# Altium PCB M-BOX.PcbDoc
Units mm, origin at the board's own origin, x right, y up, seen from the top; angles counter-clockwise.
Board outline 35.56 x 60.96 mm, 2 copper layers (Top Layer, Bottom Layer); 37 components, 91 nets, 304 pads, 186 vias.
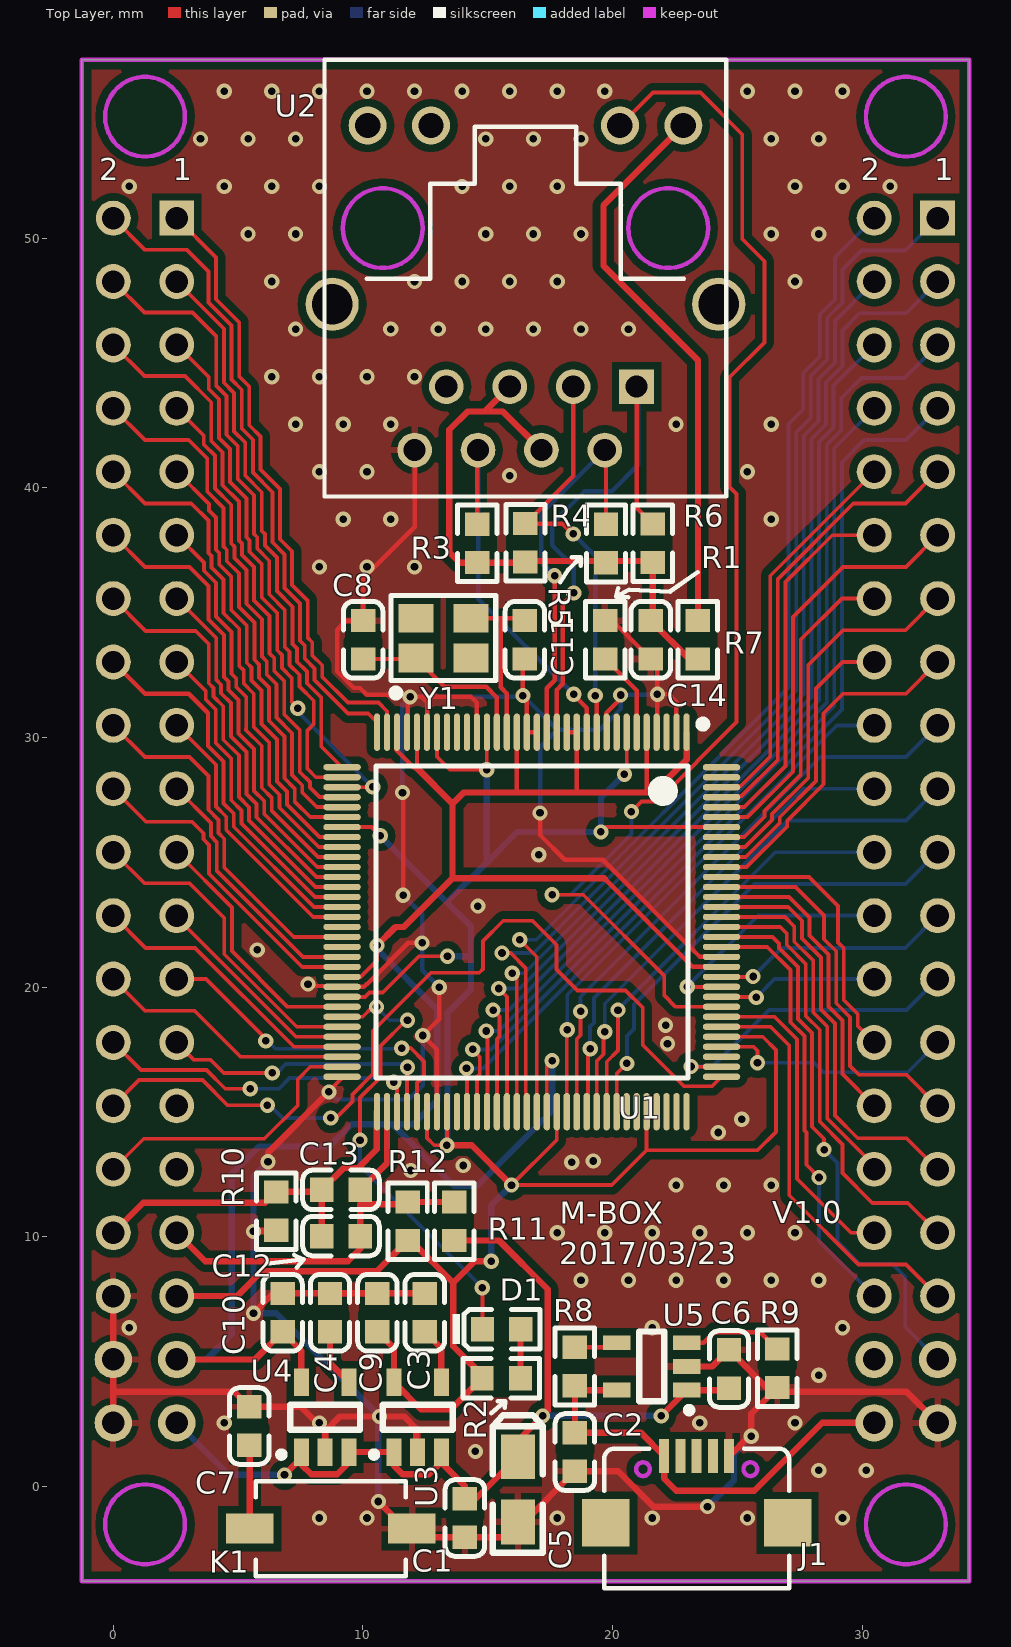
[diagram p0: Top Layer view]
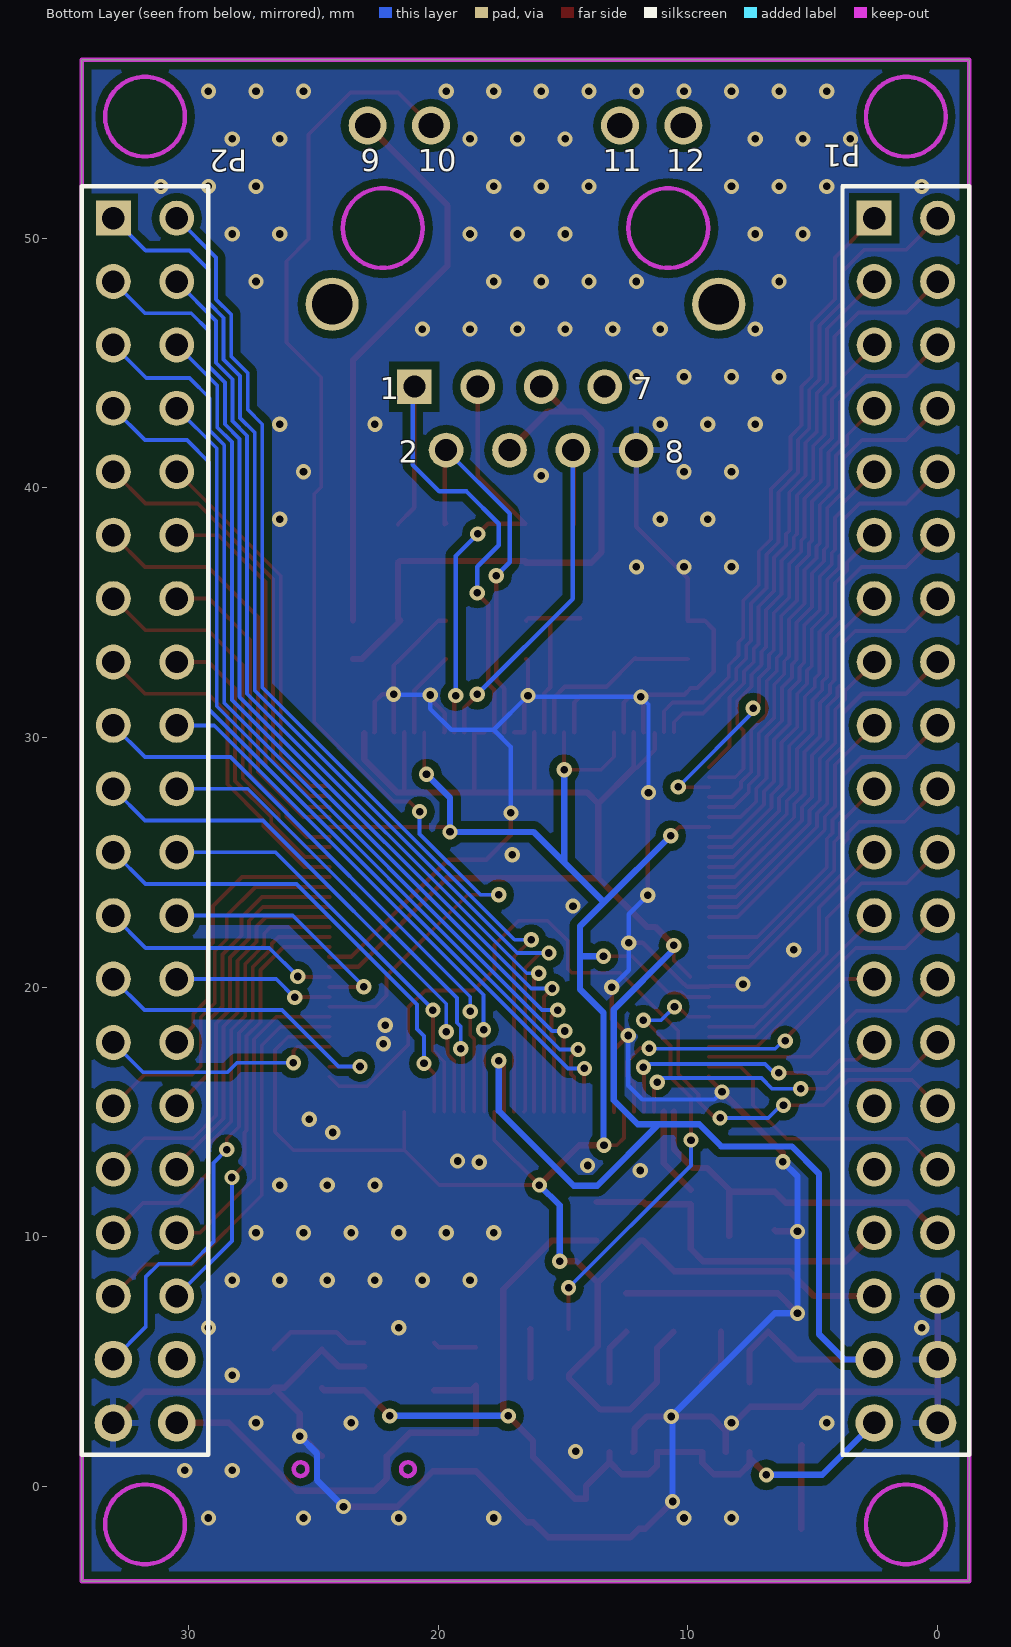
[diagram p1: Bottom Layer view, seen from below]

## Layer stack, top to bottom
Top Solder: solder mask 0.0102, Solder Resist, Dk 3.5
Top Layer: signal copper 0.0356
Dielectric 1: dielectric 0.32, FR-4, Dk 4.8
Bottom Layer: signal copper 0.0356
Bottom Solder: solder mask 0.0102, Solder Resist, Dk 3.5

## Board outline
-1.27,-3.81 -1.27,57.15 34.29,57.15 34.29,-3.81

## Design rules (kind name [scope] priority, off if disabled: settings)
Clearance [All] p1: gap=0.127
ComponentClearance [All] p1 off: gap=0.254 collisioncheckmode=3 verticalgap=0.178 showdistances=FALSE
Height [All] p1 off: minheight=0 maxheight=25.4 prefheight=12.7
HoleSize [All] p1 off: absolutevalues=TRUE maxlimit=2.54 minlimit=0.025 maxpercent=80.000 minpercent=20.000
HoleToHoleClearance [All] p1 off: gap=0.178 allowstackedmicrovias=TRUE
LayerPairs [All] p1 off: enforce=TRUE
MinimumSolderMaskSliver [All] p1 off: minsoldermaskwidth=0.178
NetAntennae [All] p1 off: netantennaetolerance=0
PolygonConnect ISVIA [ISVIA] p1: connectstyle=Direct reliefconductorwidth=0.254 reliefentries=4 polygonreliefangle="90 Angle" airgapwidth=0.254
PolygonConnect [All] p2: connectstyle=Relief reliefconductorwidth=0.254 reliefentries=4 polygonreliefangle="90 Angle" airgapwidth=0.254
RoutingVias [All] p1: holewidth=0.305 width=0.61 viastyle="Through Hole" minholewidth=0.305 minwidth=0.61 maxholewidth=0.305 maxwidth=0.61
SilkToBoardRegionClearance [All] p1 off:
SilkToSilkClearance [All] p1 off: silktosilkclearance=0.178
SilkToSolderMaskClearance [IsPad] p1 off: minsilkscreentomaskgap=0.178 clearancetoexposedcopper=TRUE
SolderMaskExpansion [All] p1: expansion=0.102
Width [All] p1: maxlimit=0.254 minlimit=0.152 preferedwidth=0.254
20 further rules are at their usual default settings.

## Components (designator, comment, footprint, x,y, rotation, side; value= is the part's Value field where it differs from the comment)
C1 "1uF/X7R" LC-0603_C 14.084,-1.27 r90 top
C2 "1uF" LC-0603_C 18.491,1.372 r90 top
C3 "22nF" LC-0603_C 12.478,6.957 r270 top
C4 "22nF" LC-0603_C 8.68,6.957 r270 top
C5 "220uF/6.3V" LC-CASE-A_3216 16.207,-0.126 r90 top
C6 "1uF" LC-0603_C 24.663,4.699 r270 top
C7 "100nF" LC-0603_C 5.445,2.416 r270 top
C8 "20pF" LC-0603_C 10.008,33.909 r270 top
C9 "100nF" LC-0603_C 10.579,6.957 r270 top
C10 "100nF" LC-0603_C 6.782,6.957 r270 top
C11 "20pF" LC-0603_C 16.485,33.909 r90 top
C12 "100nF" LC-0603_C 9.121,10.023 r0 top
C13 "1uF" LC-0603_C 9.121,11.874 r0 top
C14 "100nF" LC-0603_C 21.531,33.909 r90 top
D1 "黄灯 0603" LC-0603_LED_S1 15.554,6.296 r0 top
J1 "MicroUSB" MicroUSB 23.368,-0.127 r180 top
K1 "TS-1107U" TS-1107U 8.712,-1.699 r0 top
P1 "H2X20C" H2X20C 1.27,29.21 r270 bottom
P2 "H2X20C" H2X20C 31.75,29.21 r270 bottom
R1 "18KΩ" LC-0603_R 19.702,33.909 r90 top
R2 "1KΩ" LC-0603_R 15.539,4.335 r180 top
R3 "47Ω" LC-0603_R 14.58,37.77 r90 top
R4 "47Ω" LC-0603_R 16.51,37.793 r90 top
R5 "47Ω" LC-0603_R 19.736,37.766 r90 top
R6 "47Ω" LC-0603_R 21.615,37.776 r90 top
R7 "470Ω" LC-0603_R 23.419,33.909 r90 top
R8 "10KΩ" LC-0603_R 18.491,4.801 r270 top
R9 "6.8KΩ" LC-0603_R 26.594,4.724 r90 top
R10 "0Ω" LC-0603_R 6.528,11.024 r90 top
R11 "0Ω" LC-0603_R 13.665,10.617 r90 top
R12 "0Ω" LC-0603_R 11.786,10.617 r90 top
U1 "CH9130L" LC-LQFP-128_14x14x04P 16.764,22.606 r180 top
U2 "HY951180A" HY951180A 16.51,50.4 r0 top
U3 "RT9193-33GB" LC-SOT-23-5 12.192,2.771 r270 top
U4 "RT9193-18GB" LC-SOT-23-5 8.484,2.771 r270 top
U5 "EC100D" LC-SOT-23-5 21.565,4.801 r0 top
Y1 "30MHZ 12PF 10PPM" LC-SMD-3225_4P 13.221,33.977 r0 top

## Footprints (in the part's own frame and the unit in brackets; to place one, negate y for a bottom-side part, rotate by r counter-clockwise, add the part's x,y. Pads: shape width x height; smd on the part's side, far side on the other; paste and mask are expansions set on the pad)
H2X20C [mm]
  rect 1.4x1.4 hole 0.9: 1(-21.59,-1.27)
  round 1.4 hole 0.9: 2(-21.59,1.27) 3(-19.05,-1.27) 4(-19.05,1.27) 5(-16.51,-1.27) 6(-16.51,1.27) 7(-13.97,-1.27) 8(-13.97,1.27) 9(-11.43,-1.27) 10(-11.43,1.27) 11(-8.89,-1.27) 12(-8.89,1.27) 13(-6.35,-1.27) 14(-6.35,1.27) 15(-3.81,-1.27) 16(-3.81,1.27) 17(-1.27,-1.27) 18(-1.27,1.27) 19(1.27,-1.27) 20(1.27,1.27) 21(3.81,-1.27) 22(3.81,1.27) 23(6.35,-1.27) 24(6.35,1.27) 25(8.89,-1.27) 26(8.89,1.27) 27(11.43,-1.27) 28(11.43,1.27) 29(13.97,-1.27) 30(13.97,1.27) 31(16.51,-1.27) 32(16.51,1.27) 33(19.05,-1.27) 34(19.05,1.27) 35(21.59,-1.27) 36(21.59,1.27)
  round 1.5 hole 0.9: 37(24.13,-1.27) 38(24.13,1.27) 39(26.67,-1.27) 40(26.67,1.27)
  silkscreen extent -22.86,-2.54 27.94,2.54, body extent -22.86,-2.5 27.94,2.52, height 10.84
HY951180A [mm]
  round 2.13 hole 1.63: 0(-7.745,-3.05) 0(7.745,-3.05)
  rect 1.39x1.39 hole 0.89: 1(4.45,-6.35)
  round 1.39 hole 0.89: 2(3.18,-8.89) 3(1.91,-6.35) 4(0.64,-8.89) 5(-0.63,-6.35) 6(-1.9,-8.89) 7(-3.17,-6.35) 8(-4.44,-8.89)
  round 1.52 hole 1.02: 9(6.325,4.11) 10(3.785,4.11) 11(-3.785,4.11) 12(-6.325,4.11)
  Keep-Out Layer circle w0.178: c5.715,0 r1.6
  Keep-Out Layer circle w0.178: c-5.715,0 r1.6
  silkscreen extent -8.05,-10.75 8.05,6.75
LC-0603_C [mm]
  rect 0.93x0.98 smd: 1(-0.77,0) 2(0.77,0)
  silkscreen extent -1.53,-0.79 1.54,0.79, body extent -0.8,-0.4 0.8,0.4, height 0.3
LC-0603_LED_S1 [mm]
  rect 0.93x0.98 smd: A(0.77,0) K(-0.77,0)
  silkscreen extent -1.97,-0.79 1.54,0.79, body extent -0.8,-0.4 0.8,0.4, height 0.6
LC-0603_R [mm]
  rect 0.93x0.98 smd: 1(-0.77,0) 2(0.77,0)
  silkscreen extent -1.53,-0.79 1.54,0.79, body extent -0.85,-0.4 0.85,0.4, height 0.56
LC-CASE-A_3216 [mm]
  rect 1.8x1.35 smd: 1(1.31,0) 2(-1.31,0)
  silkscreen extent -2.54,-1 2.97,1, body extent -1.7,-0.84 1.7,0.84, height 1.71
LC-LQFP-128_14x14x04P [mm]
  oval 0.25x1.5 smd mask+0.051: 1(-6.2,-7.6) 2(-5.8,-7.6) 3(-5.4,-7.6) 4(-5,-7.6) 5(-4.6,-7.6) 6(-4.2,-7.6) 7(-3.8,-7.6) 8(-3.4,-7.6) 9(-3,-7.6) 10(-2.6,-7.6) 11(-2.2,-7.6) 12(-1.8,-7.6) 13(-1.4,-7.6) 14(-1,-7.6) 15(-0.6,-7.6) 16(-0.2,-7.6) 17(0.2,-7.6) 18(0.6,-7.6) 19(1,-7.6) 20(1.4,-7.6) 21(1.8,-7.6) 22(2.2,-7.6) 23(2.6,-7.6) 24(3,-7.6) 25(3.4,-7.6) 26(3.8,-7.6) 27(4.2,-7.6) 28(4.6,-7.6) 29(5,-7.6) 30(5.4,-7.6) 31(5.8,-7.6) 32(6.2,-7.6) 65(6.2,7.6) 66(5.8,7.6) 67(5.4,7.6) 68(5,7.6) 69(4.6,7.6) 70(4.2,7.6) 71(3.8,7.6) 72(3.4,7.6) 73(3,7.6) 74(2.6,7.6) 75(2.2,7.6) 76(1.8,7.6) 77(1.4,7.6) 78(1,7.6) 79(0.6,7.6) 80(0.2,7.6) 81(-0.2,7.6) 82(-0.6,7.6) 83(-1,7.6) 84(-1.4,7.6) 85(-1.8,7.6) 86(-2.2,7.6) 87(-2.6,7.6) 88(-3,7.6) 89(-3.4,7.6) 90(-3.8,7.6) 91(-4.2,7.6) 92(-4.6,7.6) 93(-5,7.6) 94(-5.4,7.6) 95(-5.8,7.6) 96(-6.2,7.6)
  oval 1.5x0.25 smd mask+0.051: 33(7.6,-6.2) 34(7.6,-5.8) 35(7.6,-5.4) 36(7.6,-5) 37(7.6,-4.6) 38(7.6,-4.2) 39(7.6,-3.8) 40(7.6,-3.4) 41(7.6,-3) 42(7.6,-2.6) 43(7.6,-2.2) 44(7.6,-1.8) 45(7.6,-1.4) 46(7.6,-1) 47(7.6,-0.6) 48(7.6,-0.2) 49(7.6,0.2) 50(7.6,0.6) 51(7.6,1) 52(7.6,1.4) 53(7.6,1.8) 54(7.6,2.2) 55(7.6,2.6) 56(7.6,3) 57(7.6,3.4) 58(7.6,3.8) 59(7.6,4.2) 60(7.6,4.6) 61(7.6,5) 62(7.6,5.4) 63(7.6,5.8) 64(7.6,6.2) 97(-7.6,6.2) 98(-7.6,5.8) 99(-7.6,5.4) 100(-7.6,5) 101(-7.6,4.6) 102(-7.6,4.2) 103(-7.6,3.8) 104(-7.6,3.4) 105(-7.6,3) 106(-7.6,2.6) 107(-7.6,2.2) 108(-7.6,1.8) 109(-7.6,1.4) 110(-7.6,1) 111(-7.6,0.6) 112(-7.6,0.2) 113(-7.6,-0.2) 114(-7.6,-0.6) 115(-7.6,-1) 116(-7.6,-1.4) 117(-7.6,-1.8) 118(-7.6,-2.2) 119(-7.6,-2.6) 120(-7.6,-3) 121(-7.6,-3.4) 122(-7.6,-3.8) 123(-7.6,-4.2) 124(-7.6,-4.6) 125(-7.6,-5) 126(-7.6,-5.4) 127(-7.6,-5.8) 128(-7.6,-6.2)
  silkscreen extent -7,-8.07 6.25,6.25
LC-SMD-3225_4P [mm]
  rect 1.4x1.15 smd: 1(-1.1,-0.8) 2(1.1,-0.8) 3(1.1,0.8) 4(-1.1,0.8)
  silkscreen extent -2.1,-2.35 2.1,1.7, body extent -1.6,-1.25 1.6,1.25, height 0.61
LC-SOT-23-5 [mm]
  rect 1.1x0.6 smd: 1(1.4,-0.95) 2(1.4,0) 3(1.4,0.95) 4(-1.4,0.95) 5(-1.4,-0.95)
  silkscreen extent -0.5,-1.87 1.62,1.4
MicroUSB [mm]
  rect 1.9x1.9 smd: 0(-3.64,1.338) 0(3.64,1.338)
  rect 0.4x1.35 smd: 1(1.3,-1.338) 2(0.65,-1.338) 3(0,-1.338) 4(-0.65,-1.338) 5(-1.3,-1.338)
  Keep-Out Layer circle w0.178: c2.15,-0.813 r0.275
  Keep-Out Layer circle w0.178: c-2.15,-0.813 r0.275
  silkscreen extent -3.7,-1.64 3.7,3.96
TS-1107U [mm] "轻触按钮"
  rect 1.9x1.2 smd: 1(-3.25,0) 2(3.25,0)
  silkscreen extent -3,-1.9 3,1.9

## Part data
C1 C2 C6 C13: library part "0603 1uF (105) 10% 50V", "贴片电容"
C3 C4: library part "0603 22nF (223) 10% 50V", "贴片电容"
C5: library part "3216 10uF (106) 10% 16V", "钽电容"
C7 C9 C10 C12 C14: library part "0603 100nF (104) 10% 50V", "贴片电容"
C8 C11: library part "0603 20pF (200) 5% 50V", "贴片电容"
D1: library part "0603 黄灯", "发光二极管"
K1: library part SW_TS-1107U, "轻触按钮"
P1 P2: "排母/2.54mm 2*20P 长脚排座"
R1: library part "0603 18KΩ (1802) 1%", "贴片电阻"
R2: library part "0603 1KΩ (1001) 1%", "贴片电阻"
R3 R4 R5 R6: library part "0603 47Ω (47R0) 1%", "贴片电阻"
R7: library part "0603 470Ω (4700) 1%", "贴片电阻"
R8: library part "0603 10KΩ (1002) 1%", "贴片电阻"
R9: library part "0603 6.8KΩ (6801) 1%", "贴片电阻"
R10 R11 R12: library part "0603 0Ω (0R0) 1%", "贴片电阻"
U1: "以太网扩展多外设接口芯片"
U2: "网口"
U3: "RT9193 Series 300 mA 3.3 V"
U4: "RT9193 Series 1.8V 300 mA"
U5: "短路、过流保护芯片"
Y1: library part "SMD-3225_4P  16MHZ 9PF 10PPM", "贴片晶振"

## Via types
v1: diameter 0.61, hole 0.305, Top Layer to Bottom Layer, 186 vias

## Nets (pads, with @x,y where several pads share a name; then routed paths per layer and width w, separated by ;. In a path a pad name is that pad's centre, name@x,y a point inside that pad or via, vN(x,y) a via of type N, cw(c..) or ccw(c..) an arc to the next point about the centre after c; other vN are vias at no path point)
1V8: C10.2 P1.37 U1.1 U1.5 U1.12 U1.13 U1.18 U1.28 U1.30 U1.54 U1.82 U1.108 U4.5 | length 90.5
  Top Layer w0.152: U1.54@9.906,20.406 10.566,21.066 v1(10.566,21.666) ; U1.82 17.364,16.831 v1(17.577,17.043)
  Top Layer w0.178: U1.30@11.33,30.172 11.33,29.497 12.053,28.774 12.164,28.774 U1.28 ; 16.129,27.792 16.164,27.827 U1.18 ; U1.13 U1.12 18.564,27.863 ; 19.685,24.333 23.212,20.806 U1.108 ; 21.293,27.792 21.364,27.863 U1.5
  Top Layer w0.254: P1.37 5.675,5.08 C10.2 7.534,5.435 U4.5 ; v1(10.566,21.666) 11.303,22.403 11.633,22.403 13.589,24.359 ; 12.164,28.774 13.589,27.349 ; 19.685,24.333 19.66,24.359 13.589,24.359 ; U1.1@22.968,30.172 22.968,29.115 21.646,27.792 21.293,27.792 16.129,27.792 14.033,27.792 13.589,27.349 ; 13.589,24.359 13.589,27.349
  Bottom Layer w0.254: P1.37 3.734,5.08 4.75,6.096 4.75,12.522 5.842,13.614 8.661,13.614 9.55,14.503 12.014,14.503 12.979,15.469 12.979,19.101 10.566,21.514 v1(10.566,21.666) ; 11.189,14.491 13.64,12.04 14.58,12.04 17.577,15.037 v1(17.577,17.043)
3V3: C9.2 C14.2 P1.35 R2.2 R3.1 R4.1 R5.1 R6.1 R7.1 R12.1 U1.7 U1.21 U1.26 U1.39 U1.56 U1.70 U1.72 U1.83 U1.92 U1.101 U1.122 U2.4 U2.5 U3.5 | length 129.5
  Top Layer w0.152: U1.56 10.081,19.606 10.262,19.787 10.795,19.787 12.243,21.234 v1(13.386,21.234) ; U1.39 10.348,26.406 v1(10.693,26.06) ; U1.70 12.564,13.954 12.856,13.662 v1(13.364,13.662) U1.72 ; U1.26 12.964,29.225 13.487,28.702 v1(14.961,28.702) 14.961,30.203 U1.21 ; U1.83 17.764,13.878 v1(15.951,12.065) 19.964,12.065 21.107,13.208 ; v1(19.533,26.213) 19.726,26.406 U1.122 ; v1(20.472,28.524) 20.564,28.616 U1.7 ; U1.92 21.364,13.465 21.107,13.208 ; U1.101 26.012,18.006 26.543,17.475 26.543,14.199 25.806,13.462 21.361,13.462 21.107,13.208
  Top Layer w0.254: P1.35 4.953,7.62 5.944,8.611 10.549,8.611 R12.1 11.921,9.847 13.614,8.153 ; C9.2 11.242,5.524 U3.5 12.339,3.073 13.507,3.073 R2.2 14.769,4.459 13.614,5.613 13.614,8.153 ; v1(13.364,13.662) 14.355,13.662 v1(15.951,12.065) ; v1(15.138,9.017) 14.478,9.017 13.614,8.153 ; U2.5 14.883,43.053 ; U2.4 15.607,43.053 14.883,43.053 ; R7.1 23.071,33.139 C14.2 21.615,34.763 R6.1 21.559,37.063 16.51,37.063 R4.1 16.487,37 R3.1 13.876,37 13.462,37.414 13.462,42.316 14.199,43.053 14.883,43.053
  Bottom Layer w0.254: v1(10.693,26.06) 13.364,23.39 ; v1(13.364,13.662) 13.386,13.683 13.386,18.974 14.326,19.914 14.326,21.234 ; v1(13.386,21.234) 14.326,21.234 ; v1(14.961,28.702) 14.961,24.986 ; v1(15.138,9.017) 15.138,11.252 v1(15.951,12.065) ; v1(20.472,28.524) 19.533,27.584 v1(19.533,26.213) 16.187,26.213 14.961,24.986 ; 13.364,23.39 14.326,22.428 14.326,21.234 ; 13.364,23.39 14.961,24.986
5V: C1.2 C5.1 C6.2 P1.39 R11.1 U3.1 U3.3 U4.1 U4.3 U5.1 | length 39.1
  Top Layer w0.254: v1(6.858,0.457) U4.1@7.534,1.133 ; U4.1 U4.1@7.534,1.133 ; R11.1 15.451,9.847 17.399,7.899 17.399,3.023 v1(17.196,2.819) 16.207,1.83 C5.1 14.524,-0.5 C1.2 14.084,0.013 13.142,0.955 U3.3 13.142,0.975 12.649,0.483 11.582,0.483 11.242,0.823 U3.1 U4.3 9.434,0.95 8.966,0.483 7.925,0.483 7.534,0.874 U4.1@7.534,1.133 ; v1(21.946,2.819) 21.946,2.832 U5.1 24.585,3.851 C6.2
  Bottom Layer w0.254: P1.39 4.623,0.457 v1(6.858,0.457) ; v1(17.196,2.819) v1(21.946,2.819)
A0: P2.18 U1.84 | length 21.5
  Top Layer w0.152: U1.84 18.164,18.266 v1(18.186,18.288)
  Bottom Layer w0.152: v1(18.186,18.288) 18.186,19.689 28.977,30.48 P2.18
A1: P2.17 U1.85 | length 23.5
  Top Layer w0.152: U1.85 18.564,17.911 18.72,18.067 v1(18.72,19.025)
  Bottom Layer w0.152: v1(18.72,19.025) 18.72,19.609 28.321,29.21 31.75,29.21 P2.17
A2: P2.20 U1.86 | length 19.4
  Top Layer w0.152: U1.86 19.01,15.052 19.01,17.436 v1(19.101,17.526)
  Bottom Layer w0.152: v1(19.101,17.526) 19.101,18.415 19.253,18.567 19.253,19.558 27.635,27.94 P2.20
A3: P2.19 U1.87 | length 21.4
  Top Layer w0.152: U1.87 19.364,17.035 19.634,17.305 19.634,18.161 v1(19.685,18.212)
  Bottom Layer w0.152: v1(19.685,18.212) 19.685,19.329 27.026,26.67 31.75,26.67 P2.19
A4: P2.22 U1.88 | length 17.2
  Top Layer w0.152: U1.88 19.764,17.004 20.218,17.458 v1(20.218,19.075)
  Bottom Layer w0.152: v1(20.218,19.075) 20.218,19.1 26.518,25.4 P2.22
A5: P2.21 U1.89 | length 19.3
  Top Layer w0.152: U1.89 20.164,16.532 v1(20.574,16.942)
  Bottom Layer w0.152: v1(20.574,16.942) 20.574,18.034 20.853,18.313 20.853,19.304 25.679,24.13 31.73,24.13 33,25.4 P2.21
ADC_IN0: P1.25 U1.69 | length 13.6
  Top Layer w0.152: P1.25 3.708,20.32 6.172,17.856 6.117,17.856 v1(6.102,17.841) ; v1(11.557,17.551) 11.913,17.551 12.446,17.018 12.446,16.441 12.164,16.159 U1.69
  Bottom Layer w0.152: v1(6.102,17.841) 6.187,17.841 6.502,17.526 11.532,17.526 v1(11.557,17.551)
ADC_IN1: P1.27 U1.68 | length 11.7
  Top Layer w0.152: P1.27 3.237,17.083 3.904,17.083 4.426,16.561 v1(6.368,16.561) ; U1.68 11.764,16.768 v1(11.786,16.789)
  Bottom Layer w0.152: v1(6.368,16.561) 6.553,16.561 6.909,16.916 11.659,16.916 v1(11.786,16.789)
ADC_IN2: P1.28 U1.67 | length 13.5
  Top Layer w0.152: P1.28 1.103,16.677 3.736,16.677 4.486,15.926 v1(5.486,15.926) ; v1(11.231,16.188) 11.364,16.054 U1.67
  Bottom Layer w0.152: v1(5.486,15.926) 6.631,15.926 7.061,16.356 11.062,16.356 v1(11.231,16.188)
ADC_VRB: C12.1 C13.1 P1.34 R10.2 U1.65 | length 15.2
  Top Layer w0.254: P1.34 1.194,11.354 6.088,11.354 R10.2 C13.1@8.27,11.794 ; C12.1 C13.1 9.227,12.751 9.804,12.751 10.558,13.504 U1.65@10.558,15 ; U1.65@10.558,15.006 U1.65@10.558,15 ; U1.65 U1.65@10.558,15
ADC_VRT: C12.2 C13.2 P1.33 R11.2 R12.2 U1.66 | length 17.2
  Top Layer w0.254: P1.33 3.683,9.017 9.398,9.017 9.891,9.51 C12.2 9.891,11.303 11.701,11.303 R12.2 R11.2 ; C13.2 10.964,12.947 U1.66
CS#: P2.27 U1.100 | length 9.9
  Top Layer w0.152: U1.100 25.65,17.606 25.806,17.45 v1(25.806,16.967)
  Bottom Layer w0.152: v1(25.806,16.967) 28.067,16.967 28.448,16.586 31.826,16.586 P2.27
CTS0: P2.38 U1.93
CTS1: P2.35 U1.102 | length 16.6
  Top Layer w0.152: U1.102 26.323,18.406 27.076,17.653 27.076,11.659 29.845,8.89 31.75,8.89 P2.35
D0: P2.15 U1.118 | length 13.9
  Top Layer w0.152: U1.118 25.365,24.806 27,26.441 27,26.673 28.448,28.121 28.448,30.968 29.23,31.75 31.75,31.75 P2.15
D1: P2.16 U1.119 | length 11.7
  Top Layer w0.152: U1.119 25.334,25.206 26.695,26.568 26.695,26.799 28.143,28.247 28.143,31.953 29.21,33.02 P2.16
D2: P2.13 U1.120 | length 15.6
  Top Layer w0.152: U1.120 25.303,25.606 26.391,26.694 26.391,26.925 27.838,28.373 27.838,32.898 29.23,34.29 31.73,34.29 33,35.56 P2.13
D3: P2.14 U1.121 | length 13.4
  Top Layer w0.152: U1.121 25.272,26.006 26.086,26.82 26.086,27.052 27.534,28.5 27.534,33.909 29.185,35.56 P2.14
D4: P2.11 U1.123 | length 17
  Top Layer w0.152: U1.123 25.409,26.806 27.229,28.626 27.229,34.826 29.233,36.83 31.75,36.83 P2.11
D5: P2.12 U1.124 | length 14.9
  Top Layer w0.152: U1.124 25.272,27.206 26.924,28.858 26.924,36.222 28.802,38.1 P2.12
D6: P2.9 U1.125 | length 18.3
  Top Layer w0.152: U1.125 24.41,27.652 25.167,27.652 26.619,29.105 26.619,36.348 29.641,39.37 31.73,39.37 33,40.64 P2.9
D7: P2.10 U1.126 | length 15.6
  Top Layer w0.152: U1.126 24.41,28.052 25.135,28.052 26.314,29.231 26.314,36.474 P2.10
D8: P2.7 U1.74 | length 37.4
  Top Layer w0.152: v1(14.148,16.739) 14.164,16.722 U1.74
  Bottom Layer w0.152: v1(14.148,16.739) 14.804,16.739 29.185,31.119 29.185,41.021 30.074,41.91 31.75,41.91 P2.7
D9: P2.8 U1.75 | length 35.4
  Top Layer w0.152: v1(14.402,17.501) 14.402,17.475 14.681,17.196 14.681,16.518 14.564,16.4 U1.75
  Bottom Layer w0.152: v1(14.402,17.501) 15.135,17.501 28.88,31.245 28.88,41.58 P2.8
D10: P2.5 U1.76 | length 39.5
  Top Layer w0.152: v1(14.935,18.237) 14.986,18.186 14.986,15.028 U1.76
  Bottom Layer w0.152: v1(14.935,18.237) 15.441,18.237 28.575,31.371 28.575,41.706 29.159,42.29 29.159,43.586 29.972,44.399 31.699,44.399 P2.5
D11: P2.6 U1.77 | length 37.6
  Top Layer w0.152: v1(15.215,19.075) 15.469,18.821 15.469,18.016 15.364,17.912 U1.77
  Bottom Layer w0.152: v1(15.215,19.075) 15.848,19.075 28.27,31.497 28.27,41.832 28.854,42.417 28.854,44.094 P2.6
D12: P2.3 U1.78 | length 42.3
  Top Layer w0.152: v1(15.443,19.939) 15.773,19.609 15.773,15.015 U1.78
  Bottom Layer w0.152: v1(15.443,19.939) 16.281,19.939 27.965,31.624 27.965,41.959 28.55,42.543 28.55,44.221 29.21,44.881 29.21,46.304 29.896,46.99 31.75,46.99 P2.3
D13: P2.4 U1.79 | length 39.6
  Top Layer w0.152: v1(15.977,20.549) 16.164,20.361 U1.79
  Bottom Layer w0.152: v1(15.977,20.549) 16.459,20.549 27.661,31.75 27.661,42.085 28.245,42.669 28.245,44.347 28.905,45.007 28.905,46.685 P2.4
D14: P2.1 U1.80 | length 45.4
  Top Layer w0.152: v1(15.57,21.361) 15.918,21.361 16.518,20.762 16.518,15.052 U1.80
  Bottom Layer w0.152: v1(15.57,21.361) 16.841,21.361 27.356,31.876 27.356,42.211 27.94,42.795 27.94,44.473 28.6,45.134 28.6,46.811 29.21,47.421 29.21,48.743 29.972,49.505 31.725,49.505 P2.1
D15: P2.2 U1.81 | length 42.3
  Top Layer w0.152: v1(16.281,21.895) 16.964,21.212 U1.81
  Bottom Layer w0.152: v1(16.281,21.895) 16.943,21.895 27.051,32.003 27.051,42.545 27.635,43.129 27.635,44.599 28.296,45.26 28.296,46.938 28.905,47.547 28.905,49.225 P2.2
ELINK#: U1.104 U2.10 | length 50.6
  Top Layer w0.152: v1(17.577,23.698) 18.821,23.698 22.073,20.447 22.073,19.66 22.526,19.206 U1.104 ; U2.10 21.614,55.829 23.52,55.829 25.197,54.153 25.197,49.962 26.086,49.073 26.086,45.822 24.689,44.425 24.689,40.03 24.968,39.751 24.968,30.612 21.793,27.437 21.163,27.437 v1(20.752,27.026)
  Bottom Layer w0.152: v1(17.577,23.698) 18.316,23.698 20.752,26.134 v1(20.752,27.026)
GND: C1.1 C2.1 C3.1 C4.1 C5.2 C6.1 C7.1 C8.1 C9.1 C10.1 C11.1 C14.1 J1.5 K1.2 P1.36 P1.38 P1.40 P2.39 R1.2 R9.1 R10.1 U1.2 U1.4 U1.9 U1.16 U1.17 U1.22 U1.27 U1.29 U1.55 U1.64 U1.71 U1.109 U2.8 U3.2 U4.2 U5.2 | length 171.7
  Top Layer w0.178: v1(7.798,20.117) 7.875,20.04 9.13,20.04 U1.55 10.032,20.006 10.13,20.104 10.147,20.104 11.811,21.768 v1(12.37,21.768) ; v1(8.636,15.799) 8.636,15.824 9.164,16.352 U1.64 ; v1(11.582,27.788) 11.608,27.762 v1(11.608,23.673) ; U1.29 11.798,30.24 11.798,31.534 v1(11.887,31.623) ; U2.8 12.07,38.435 10.008,36.373 C8.1 9.33,34.679 8.966,34.315 8.966,32.639 9.627,31.979 9.881,31.979 10.147,31.712 11.798,31.712 v1(11.887,31.623) ; U1.27 12.573,30.215 12.573,31.394 12.344,31.623 ; U1.71 12.964,17.491 v1(12.395,18.059) 13.056,18.72 v1(13.056,19.99) ; U1.22 14.554,30.216 14.554,31.394 14.326,31.623 12.344,31.623 ; C11.1 16.408,33.063 v1(16.408,31.674) 16.564,31.518 U1.17 U1.16 ; v1(17.094,26.975) 17.094,26.086 18.085,25.095 19.609,25.095 23.498,21.206 U1.109 ; R1.2 19.991,34.679 C14.1 21.793,32.877 v1(21.793,31.725) ; U1.9 19.736,30.234 19.736,30.963 20.32,31.547 v1(20.32,31.699) ; U1.4 21.793,30.235 v1(21.793,31.725) ; U1.2 22.555,30.215 22.555,31.42 22.25,31.725 v1(21.793,31.725) ; v1(11.887,31.623) 12.344,31.623
  Top Layer w0.254: P1.40 0,3.81 ; P1.36 P1.38 0,3.81 ; v1(5.613,6.934) 6.406,7.727 C10.1 C4.1 C9.1 C3.1 ; v1(5.613,10.211) 6.485,10.211 R10.1 ; v1(6.198,13.005) 6.198,13.36 v1(8.636,15.799) ; U4.2 8.484,2.21 ; v1(10.617,-0.61) 11.707,-1.699 K1.2 12.303,-2.04 C1.1 15.604,-2.04 C5.2 16.453,-1.436 C2.1 20.226,0.602 21.641,-0.813 v1(23.8,-0.813) ; U3.2 12.141,1.421 12.141,2.311 11.659,2.794 v1(10.668,2.794) 9.068,2.794 8.484,2.21 ; U5.2 23.995,4.801 C6.1 26.178,3.954 R9.1 ; J1.5 25.464,2.007 v1(25.552,2.007) 25.552,2.913 R9.1 ; P2.39 31.775,3.785 26.764,3.785 R9.1 ; 0,3.81 0.025,3.785 4.846,3.785 C7.1 7.508,3.186 8.484,2.21
  Bottom Layer w0.178: v1(8.636,15.799) 8.941,15.494 11.836,15.494 12.395,16.053 v1(12.395,18.059) ; v1(11.582,27.788) 11.582,31.318 v1(11.887,31.623) 16.358,31.623 v1(16.408,31.674) 17.78,30.302 ; v1(11.608,23.673) 12.37,22.911 v1(12.37,21.768) 12.37,20.676 v1(13.056,19.99) ; v1(17.094,26.975) 17.094,29.616 17.78,30.302 ; v1(21.793,31.725) 21.768,31.699 v1(20.32,31.699) 20.32,31.14 19.482,30.302 17.78,30.302
  Bottom Layer w0.254: v1(6.198,13.005) 5.613,12.421 v1(5.613,10.211) v1(5.613,6.934) 6.528,6.934 v1(10.668,2.794) 10.617,2.743 v1(10.617,-0.61) ; v1(23.8,-0.813) 24.862,0.249 24.862,1.316 v1(25.552,2.007)
  other v1: 8.255,-1.27 10.16,-1.27 17.78,-1.27 21.59,-1.27 25.4,-1.27 29.21,-1.27 28.258,0.635 30.163,0.635 14.503,1.397 4.445,2.54 8.255,2.54 23.495,2.54 27.305,2.54 28.258,4.445 0.635,6.35 21.59,6.35 29.21,6.35 18.733,8.255 20.638,8.255 22.543,8.255 24.448,8.255 26.353,8.255 28.258,8.255 17.78,10.16 19.685,10.16 21.59,10.16 23.495,10.16 25.4,10.16 27.305,10.16 22.543,12.065 24.448,12.065 26.353,12.065 11.913,12.649 14.021,12.852 18.364,12.979 19.228,13.03 24.232,14.173 25.171,14.707 22.2,17.729 22.123,18.466 5.766,21.488 14.605,23.241 17.043,25.298 8.255,36.83 10.16,36.83 12.065,36.83 9.208,38.735 11.113,38.735 26.353,38.735 15.875,40.488 8.255,40.64 10.16,40.64 25.4,40.64 7.303,42.545 9.208,42.545 11.113,42.545 22.543,42.545 26.353,42.545 6.35,44.45 8.255,44.45 10.16,44.45 12.065,44.45 7.303,46.355 11.113,46.355 13.018,46.355 14.923,46.355 16.828,46.355 18.733,46.355 20.638,46.355 6.35,48.26 12.065,48.26 13.97,48.26 15.875,48.26 17.78,48.26 27.305,48.26 5.398,50.165 7.303,50.165 14.923,50.165 16.828,50.165 18.733,50.165 26.353,50.165 28.258,50.165 0.635,52.07 4.445,52.07 6.35,52.07 8.255,52.07 13.97,52.07 15.875,52.07 17.78,52.07 27.305,52.07 29.21,52.07 31.115,52.07 3.493,53.975 5.398,53.975 7.303,53.975 14.923,53.975 16.828,53.975 18.733,53.975 26.353,53.975 28.258,53.975 4.445,55.88 6.35,55.88 8.255,55.88 10.16,55.88 12.065,55.88 13.97,55.88 15.875,55.88 17.78,55.88 19.685,55.88 25.4,55.88 27.305,55.88 29.21,55.88
GPIO0: P1.1 U1.31 | length 24.8
  Top Layer w0.152: P1.1 4.114,49.226 4.114,47.548 5.042,46.621 5.042,44.459 5.448,44.053 5.448,42.502 5.898,42.052 5.898,40.73 6.68,39.949 6.68,37.94 7.163,37.457 7.163,36.11 7.785,35.488 7.785,33.997 7.972,33.81 7.972,33.285 8.369,32.887 8.369,32.421 9.396,31.394 10.617,31.394 10.964,31.048 U1.31
GPIO1: P1.2 U1.32 | length 26.4
  Top Layer w0.152: P1.2 1.27,49.53 2.946,49.53 3.81,48.667 3.81,47.421 4.737,46.494 4.737,44.333 5.143,43.927 5.143,42.376 5.593,41.926 5.593,40.604 6.375,39.822 6.375,37.813 6.858,37.331 6.858,35.984 7.48,35.362 7.48,33.871 7.667,33.684 7.667,33.159 8.064,32.761 8.064,32.295 9.397,30.963 10.211,30.963 10.564,30.609 U1.32
GPIO2: P1.3 U1.33 | length 22.2
  Top Layer w0.152: P1.3 4.432,46.368 4.432,44.207 4.838,43.8 4.838,42.25 5.289,41.799 5.289,40.478 5.944,39.823 5.944,38.271 6.07,38.145 6.07,37.687 6.553,37.204 6.553,35.857 7.175,35.235 7.175,33.744 7.362,33.557 7.362,33.032 7.76,32.635 7.76,32.168 8.331,31.597 8.331,29.639 U1.33
GPIO3: P1.4 U1.34 | length 25.6
  Top Layer w0.152: P1.4 1.245,47.015 3.175,47.015 4.127,46.063 4.127,44.081 4.534,43.674 4.534,42.123 4.984,41.673 4.984,40.352 5.639,39.696 5.639,38.145 5.765,38.019 5.765,37.561 6.248,37.078 6.248,35.731 6.87,35.109 6.87,33.618 7.057,33.431 7.057,32.906 7.455,32.508 7.455,32.042 8.026,31.471 8.026,30.531 7.772,30.277 7.772,28.742 8.109,28.406 U1.34
GPIO4: P1.5 U1.35 | length 22.2
  Top Layer w0.152: P1.5 3.822,44.438 3.822,43.954 4.229,43.548 4.229,41.997 4.679,41.547 4.679,40.225 5.334,39.57 5.334,38.019 5.461,37.892 5.461,37.435 5.944,36.952 5.944,35.605 6.566,34.983 6.566,33.492 6.752,33.305 6.752,32.78 7.15,32.382 7.15,31.407 v1(7.391,31.166) ; U1.35 10.378,28.006 v1(10.389,28.016)
  Bottom Layer w0.152: v1(7.391,31.166) 7.391,31.013 v1(10.389,28.016)
GPIO5: P1.6 U1.36 | length 23.4
  Top Layer w0.152: P1.6 1.245,44.475 2.87,44.475 3.924,43.422 3.924,41.871 4.374,41.421 4.374,40.099 5.029,39.444 5.029,37.893 5.156,37.766 5.156,37.308 5.639,36.826 5.639,35.479 6.261,34.857 6.261,33.366 6.448,33.179 6.448,32.654 6.845,32.256 6.845,30.916 7.468,30.294 7.468,28.616 7.874,28.21 7.874,27.991 8.259,27.606 U1.36
GPIO6: P1.7 U1.37 | length 19.3
  Top Layer w0.152: P1.7 3.619,42.101 3.619,41.745 4.069,41.294 4.069,39.973 4.724,39.318 4.724,37.766 4.851,37.64 4.851,37.182 5.334,36.699 5.334,35.352 5.956,34.73 5.956,33.239 6.143,33.052 6.143,32.527 6.54,32.13 6.54,30.79 7.163,30.168 7.163,28.49 7.569,28.083 7.569,27.788 8.151,27.206 U1.37
GPIO7: P1.8 U1.38 | length 21.9
  Top Layer w0.152: P1.8 1.27,41.91 3.023,41.91 3.765,41.168 3.765,39.847 4.42,39.191 4.42,37.64 4.546,37.514 4.546,37.056 5.029,36.573 5.029,35.226 5.651,34.604 5.651,33.113 5.838,32.926 5.838,32.401 6.236,32.003 6.236,30.664 6.858,30.041 6.858,28.364 7.264,27.957 7.264,27.432 7.891,26.806 U1.38
GPIO8: P1.9 U1.40 | length 17.9
  Top Layer w0.152: P1.9 3.835,39.345 3.835,39.09 4.115,38.81 4.115,37.514 4.241,37.387 4.241,36.93 4.724,36.447 4.724,35.1 5.346,34.478 5.346,32.987 5.533,32.8 5.533,32.275 5.931,31.877 5.931,30.538 6.553,29.915 6.553,28.237 6.96,27.831 6.96,27.306 8.26,26.006 U1.40
GPIO9: P1.10 U1.41 | length 20.5
  Top Layer w0.152: P1.10 1.27,39.37 3.124,39.37 3.81,38.684 3.81,37.388 3.937,37.261 3.937,36.803 4.42,36.321 4.42,34.974 5.042,34.352 5.042,32.861 5.228,32.674 5.228,32.149 5.626,31.751 5.626,30.411 6.248,29.789 6.248,28.111 6.655,27.705 6.655,27.18 8.229,25.606 U1.41
GPIO10: P1.11 U1.42 | length 16.2
  Top Layer w0.152: P1.11 3.632,37.008 3.632,36.677 4.115,36.194 4.115,34.847 4.737,34.225 4.737,32.547 4.924,32.361 4.924,32.022 5.321,31.625 5.321,30.351 5.321,30.285 5.944,29.663 5.944,27.985 6.35,27.578 6.35,27.054 8.198,25.206 U1.42
GPIO11: P1.12 U1.43 | length 18.7
  Top Layer w0.152: P1.12 1.27,36.83 3.048,36.83 3.81,36.068 3.81,34.721 4.432,34.099 4.432,32.421 4.619,32.234 4.619,31.896 5.016,31.498 5.016,30.478 5.016,30.159 5.639,29.536 5.639,27.859 6.045,27.452 6.045,26.927 8.167,24.806 U1.43
GPIO12: P1.13 U1.44 | length 14.5
  Top Layer w0.152: P1.13 4.127,33.973 4.127,32.295 4.314,32.108 4.314,31.77 4.712,31.372 4.712,30.604 ; 4.711,30.604 4.711,30.033 5.334,29.41 5.334,27.732 5.74,27.326 5.74,26.801 8.136,24.406 U1.44
GPIO13: P1.14 U1.45 | length 17.1
  Top Layer w0.152: P1.14 1.295,34.265 3.302,34.265 3.822,33.744 3.822,32.169 4.009,31.982 4.009,31.644 4.407,31.246 4.407,30.73 4.407,29.907 5.029,29.284 5.029,27.606 5.436,27.2 5.436,26.675 8.104,24.006 U1.45
GPIO14: P1.15 U1.46 | length 12.8
  Top Layer w0.152: P1.15 3.704,31.856 3.704,31.517 4.102,31.12 4.102,30.856 4.102,29.78 4.724,29.158 4.724,27.48 5.131,27.073 5.131,26.549 8.073,23.606 U1.46
GPIO15: P1.16 U1.47 | length 15.3
  Top Layer w0.152: 3.785,30.988 3.797,30.976 3.797,29.654 4.42,29.031 4.42,27.354 4.826,26.947 4.826,26.422 8.042,23.206 U1.47
  Top Layer w0.178: P1.16 1.27,31.75 3.023,31.75 3.785,30.988
NetC3_2: C3.2 U3.4 | length 2.3
  Top Layer w0.254: C3.2 13.142,5.523 U3.4
NetC4_2: C4.2 U4.4 | length 2.3
  Top Layer w0.254: C4.2 8.68,4.924 U4.4
NetC8_2: C8.2 U1.20 Y1.1 | length 7.4
  Top Layer w0.178: C8.2 12.082,33.139 Y1.1 13.268,32.029 14.935,32.029 15.364,31.601 U1.20
NetC11_2: C11.2 U1.19 Y1.3 | length 6.9
  Top Layer w0.178: Y1.3 15.519,34.777 ; U1.19 15.764,31.759 15.519,32.004 15.519,34.777 ; C11.2 16.387,34.777 15.519,34.777
NetD1_A: D1.A R2.1 | length 2
  Top Layer w0.254: R2.1 16.309,6.281 D1.A
NetD1_K: D1.K U1.58 | length 18.2
  Top Layer w0.152: U1.58 9.992,18.806 10.389,19.202 v1(10.541,19.202) ; v1(9.881,13.868) 9.884,13.872 9.884,15.57 10.697,16.383 10.697,17.631 11.735,18.669 v1(11.786,18.669) ; D1.K v1(14.783,7.95)
  Bottom Layer w0.152: v1(9.881,13.868) 9.881,12.852 v1(14.783,7.95) ; v1(10.541,19.202) 11.074,18.669 v1(11.786,18.669)
NetR1_1: R1.1 U1.6 | length 3.5
  Top Layer w0.178: R1.1 20.964,31.877 U1.6
NetR7_2: R7.2 U2.9 | length 22.7
  Top Layer w0.254: U2.9 19.634,51.309 19.634,48.895 23.419,45.11 R7.2
NetR8_1: R8.1 U5.4 | length 1.7
  Top Layer w0.178: R8.1 19.985,5.571 U5.4
NetR9_2: R9.2 U5.3 | length 4.1
  Top Layer w0.178: U5.3 23.649,5.751 24.073,6.175 25.913,6.175 R9.2
PWM0: P1.17 U1.48 | length 11.1
  Top Layer w0.152: P1.17 4.115,28.905 4.115,27.227 4.521,26.821 4.521,26.296 8.011,22.806 U1.48
PWM1: P1.18 U1.50 | length 14.4
  Top Layer w0.152: P1.18 1.27,29.21 3.048,29.21 3.81,28.448 3.81,27.101 4.216,26.695 4.216,26.17 4.445,25.942 4.445,24.789 7.227,22.006 U1.50
PWM2: P1.19 U1.52 | length 10.4
  Top Layer w0.152: P1.19 3.912,26.568 3.912,26.044 4.14,25.815 4.14,24.662 7.596,21.206 U1.52
RD#: P2.24 U1.106 | length 10.1
  Top Layer w0.152: v1(22.987,20.015) 22.996,20.006 U1.106
  Bottom Layer w0.152: v1(22.987,20.015) 25.832,22.86 P2.24
RST#: C7.2 K1.1 P1.32 U1.63 | length 14.8
  Top Layer w0.152: P1.32 1.219,13.919 6.045,13.919 7.391,15.265 7.391,16.307 7.891,16.806 U1.63
  Top Layer w0.254: C7.2 5.462,1.629 K1.1
RSYN: P2.25 U1.98 | length 12.6
  Top Layer w0.152: v1(23.139,16.815) 23.148,16.806 U1.98
  Bottom Layer w0.152: v1(23.139,16.815) 24.003,16.815 26.264,19.075 31.775,19.075 P2.25
RTS0: P1.30 U1.97 | length 34.9
  Top Layer w0.152: P1.30 1.03,16.27 3.567,16.27 4.572,15.265 v1(6.172,15.265) ; v1(8.714,14.757) 8.919,14.757 9.58,15.418 9.58,15.696 10.392,16.509 10.392,18.241 12.725,20.574 14.656,20.574 14.808,20.726 14.808,21.844 15.621,22.657 16.789,22.657 17.755,21.692 17.755,20.701 18.593,19.863 20.523,19.863 21.209,19.177 21.209,17.677 22.858,16.027 23.985,16.027 U1.97
  Bottom Layer w0.152: v1(6.172,15.265) 6.223,15.316 6.782,14.757 v1(8.714,14.757)
RTS1/TNOW1: P2.34 U1.103 | length 13
  Top Layer w0.152: U1.103 26.482,18.806 27.381,17.907 27.381,12.319 29.54,10.16 P2.34
RXD0: P2.36 U1.110 | length 17.6
  Top Layer w0.152: U1.110 26.197,21.606 27.127,20.676 27.127,18.592 27.686,18.033 27.686,14.249 27.762,14.173 27.762,12.878 v1(28.27,12.37)
  Bottom Layer w0.152: v1(28.27,12.37) 28.27,9.83 P2.36
RXD1: P2.33 U1.112 | length 18
  Top Layer w0.152: U1.112 26.718,22.406 26.975,22.149 26.975,21.69 27.737,20.928 27.737,18.845 28.296,18.286 28.296,14.606 29.21,13.692 29.21,12.548 30.404,11.354 31.826,11.354 P2.33
RXN: R3.2 U1.11 U2.6 | length 16.1
  Top Layer w0.178: R3.2 14.58,41.48 U2.6 ; v1(18.44,31.725) 18.44,31.699 18.964,31.176 U1.11
  Bottom Layer w0.178: U2.6 14.61,35.555 v1(18.44,31.725)
RXP: R4.2 U1.10 U2.3 | length 16.7
  Top Layer w0.178: v1(18.42,38.151) 18.008,38.563 R4.2 18.42,40.473 U2.3 ; v1(19.304,31.674) 19.364,31.614 U1.10
  Bottom Layer w0.178: v1(18.42,38.151) 19.304,37.267 v1(19.304,31.674)
SPI0_MISO: P2.28 U1.117 | length 11.2
  Top Layer w0.152: U1.117 27.867,24.406 29.032,23.241 29.032,21.788 29.261,21.559 29.261,19.476 29.82,18.917 29.82,18.44 P2.28
SPI0_MOSI: P2.29 U1.116 | length 15.2
  Top Layer w0.152: U1.116 27.327,24.006 28.473,22.86 28.473,21.916 28.956,21.433 28.956,19.35 29.515,18.791 29.515,16.84 29.87,16.485 31.775,16.485 P2.29
SPI0_RSYN: P1.21 U1.57 | length 10.2
  Top Layer w0.152: P1.21 4.749,23.191 4.749,21.438 6.981,19.206 U1.57
SPI0_SCK: P2.30 U1.115 | length 12.5
  Top Layer w0.152: U1.115 27.067,23.606 27.889,22.784 27.889,22.069 28.651,21.307 28.651,19.223 29.21,18.665 29.21,16.51 P2.30
SPI0_SCS: P2.31 U1.114 | length 16.8
  Top Layer w0.152: U1.114 27.036,23.206 27.584,22.658 27.584,21.943 28.346,21.181 28.346,19.097 28.905,18.538 28.905,14.859 29.82,13.945 31.775,13.945 P2.31
SPI0_TSYNC: P1.20 U1.53 | length 12.9
  Top Layer w0.152: P1.20 0,27.934 1.315,26.619 3.15,26.619 3.607,26.162 3.607,25.917 3.835,25.689 3.835,24.536 7.565,20.806 U1.53
SPI1_SCK: P1.23 U1.60 | length 8.7
  Top Layer w0.152: P1.23 2.54,22.785 7.319,18.006 U1.60
SPI1_SCS: P1.22 U1.59 | length 12.9
  Top Layer w0.152: P1.22 1.245,24.155 3.048,24.155 4.445,22.759 4.445,21.312 7.35,18.406 U1.59
SPI1_SDI: P1.26 U1.62 | length 10.5
  Top Layer w0.152: P1.26 1.27,19.05 3.251,19.05 5.095,17.206 U1.62
SPI1_SDO: P1.24 U1.61 | length 11.3
  Top Layer w0.152: P1.24 1.295,21.565 3.277,21.565 7.235,17.606 U1.61
TNOW0: P1.31 U1.91
TSYN: P2.26 U1.105 | length 6.4
  Top Layer w0.152: U1.105 25.733,19.606 v1(25.756,19.583)
  Bottom Layer w0.152: v1(25.756,19.583) 26.492,20.32 P2.26
TXD0: P2.37 U1.111 | length 22.5
  Top Layer w0.152: U1.111 26.406,22.006 26.67,21.742 26.67,21.564 27.432,20.802 27.432,18.718 27.991,18.16 27.991,14.402 28.473,13.919 v1(28.473,13.487)
  Bottom Layer w0.152: v1(28.473,13.487) 29.007,12.954 29.007,9.804 29.896,8.915 31.191,8.915 31.725,8.382 31.725,6.375 P2.37
TXD1: P2.32 U1.113 | length 14.1
  Top Layer w0.152: U1.113 26.902,22.806 27.28,22.428 27.28,21.816 28.042,21.054 28.042,18.971 28.6,18.412 28.6,14.733 30.48,12.853 P2.32
TXN: R5.2 U1.15 U2.2 | length 15.8
  Top Layer w0.178: U1.15 17.364,31.969 17.678,32.283 v1(17.678,36.478) ; R5.2@19.69,38.581 R5.2 19.736,41.464 U2.2
  Bottom Layer w0.178: v1(17.678,36.478) 17.145,37.012 17.145,38.965 U2.2
TXP: R6.2 U1.14 U2.1 | length 22.4
  Top Layer w0.178: U1.14 17.764,31.902 18.009,32.147 18.009,35.331 18.44,35.763 v1(18.44,35.789) ; U2.1 20.96,39.201 R6.2
  Bottom Layer w0.178: v1(18.44,35.789) 18.44,36.83 17.577,37.694 17.577,38.557 18.872,39.853 19.964,39.853 21.031,40.919 21.031,43.979 U2.1
VIN: C2.2 J1.1 P2.40 R8.2 U5.5 | length 18.2
  Top Layer w0.254: U5.5 18.671,3.851 R8.2 C2.2 21.137,2.142 J1.1 22.068,0.309 22.555,-0.178 25.679,-0.178 28.397,2.54 P2.40
WR#: P2.23 U1.107 | length 9.7
  Top Layer w0.152: U1.107 25.613,20.406 v1(25.629,20.422)
  Bottom Layer w0.152: v1(25.629,20.422) 26.772,21.565 31.725,21.565 P2.23
pads on no net: J1.0 J1.2 J1.3 J1.4 P1.29 U1.3 U1.8 U1.23 U1.24 U1.25 U1.49 U1.51 U1.73 U1.90 U1.94 U1.95 U1.96 U1.99 U1.127 U1.128 U2.0 U2.7 U2.11 U2.12 Y1.2 Y1.4

## Polygon pours and split planes (outlines as drawn)
GND on Top Layer "Top Layer-No Net" (solid, remove dead copper, pour order 4): -1.27,57.15 34.29,57.15 34.29,-3.81 -1.27,-3.81
GND on Bottom Layer "Top Layer-No Net" (solid, remove dead copper, pour order 3): -1.27,57.15 34.29,57.15 34.29,-3.81 -1.27,-3.81

## Keep-outs
Keep-Out Layer:
  circle w0.178: c31.75,54.864 r1.6
  circle w0.178: c1.27,54.864 r1.6
  circle w0.178: c1.27,-1.524 r1.6
  circle w0.178: c31.75,-1.524 r1.6
  lines w0.178: -1.27,-3.81 -1.27,57.15 34.29,57.15 34.29,-3.81 -1.27,-3.81

## Silkscreen, mask and mechanical layers (free items; w line width, h text height)
Top Overlay:
  lines w0.178: 6.147,8.915 7.62,9.093 ; 7.239,9.271 7.62,9.093 ; 7.341,8.763 7.62,9.093 ; 15.138,2.921 15.697,3.404 ; 15.392,3.404 15.697,3.404 ; 15.672,3.15 15.697,3.404 ; 17.907,36.22 18.237,36.728 18.72,37.211 ; 18.364,37.211 18.72,37.211 ; 18.72,36.881 18.72,37.211 ; 20.218,35.966 20.142,35.636 ; 20.625,35.611 20.142,35.636 ; 23.406,36.623 23.406,36.614 22.301,35.839 20.676,35.916 20.142,35.636
  text "2" at -0.559,52.324 h0.89
  text "1" at 2.388,52.324 h0.89
  text "2" at 29.944,52.324 h0.89
  text "1" at 32.89,52.324 h0.89
  text "V1.0" at 26.391,10.541 h0.89
  text "M-BOX" at 17.882,10.516 h0.89
  text "2017/03/23" at 17.856,8.89 h0.89

## Text inside footprints (layer, text, board x,y; h text height)
J1: Mechanical 13 "PCB Edge" at 21.844,-2.032 h0.51
U2: Bottom Overlay "12" at 10.88,52.686 h0.89; Bottom Overlay "11" at 13.42,52.686 h0.89; Bottom Overlay "10" at 20.828,52.686 h0.89; Bottom Overlay "9" at 23.114,52.686 h0.89; Bottom Overlay "1" at 22.352,43.542 h0.89; Bottom Overlay "2" at 21.59,41.002 h0.89; Bottom Overlay "7" at 12.192,43.542 h0.89; Bottom Overlay "8" at 10.922,41.002 h0.89